# Altium PCB Bee-CC2540.PcbDoc
Units mil, origin at the board's own origin, x right, y up, seen from the top; angles counter-clockwise.
Board outline 6000 x 4000 mil, 2 copper layers (Top Layer, Bottom Layer); 47 components, 37 nets, 165 pads, 2 vias.
Unrouted connection lines stored in the file: 121.
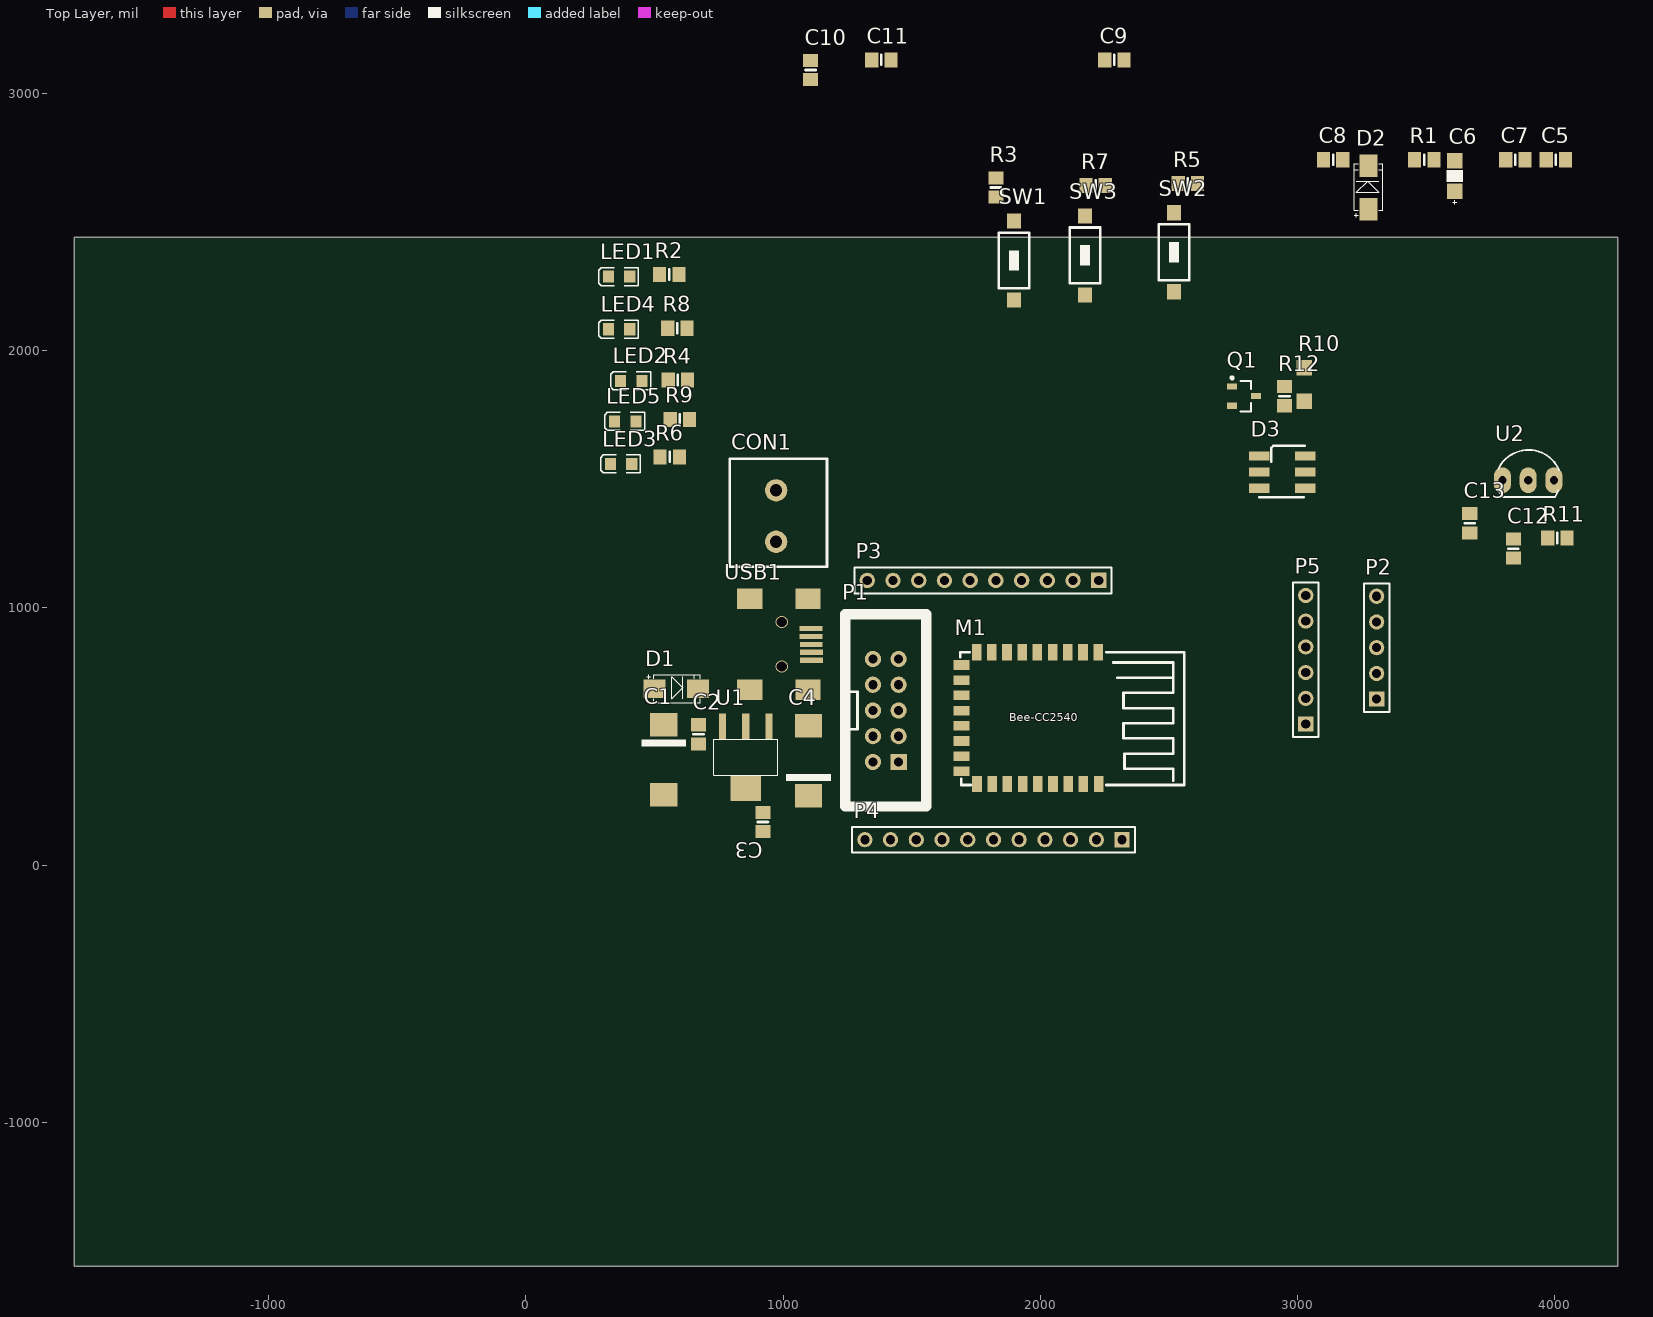
[diagram p0: Top Layer view]
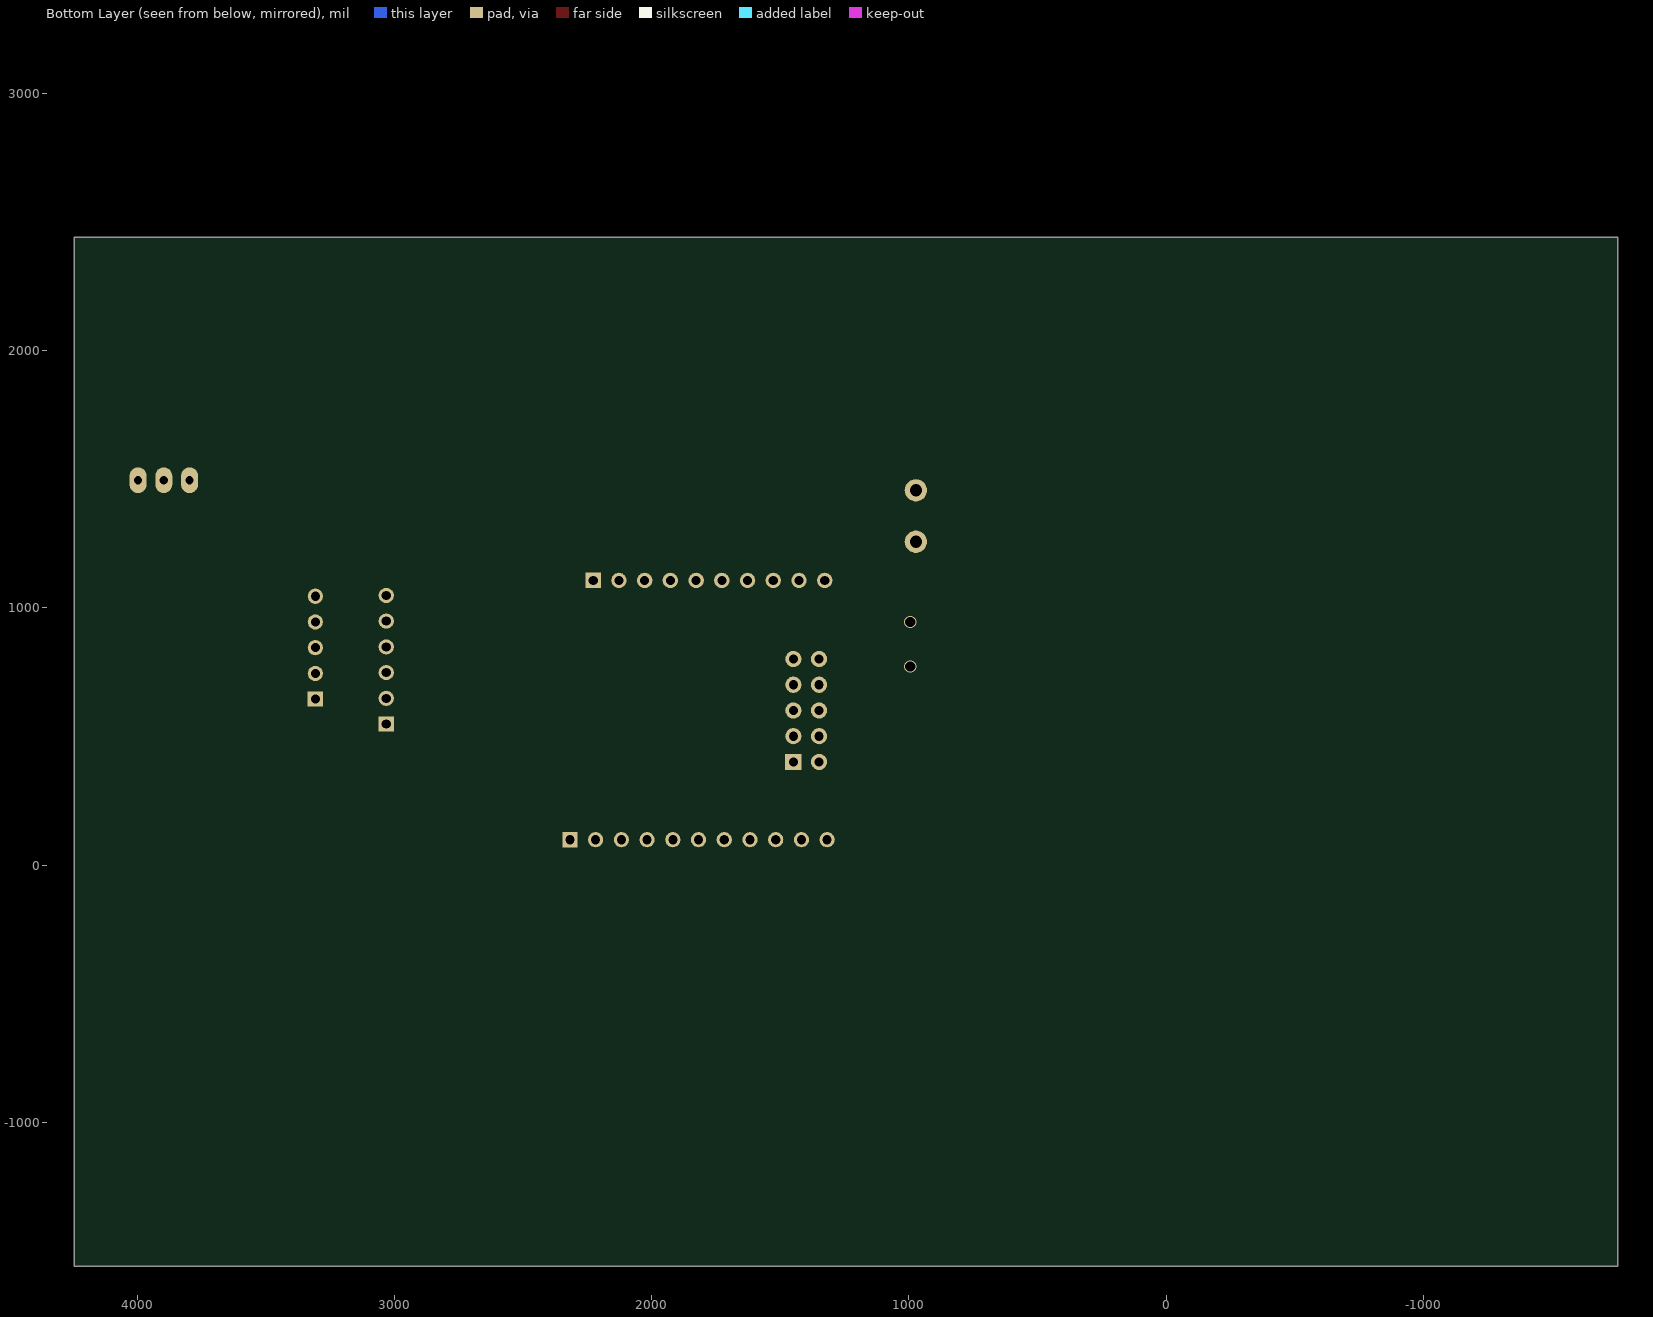
[diagram p1: Bottom Layer view, seen from below]

## Layer stack, top to bottom
Top Solder: solder mask 0.4, Solder Resist, Dk 3.5
Top Layer: signal copper 1.4
Dielectric 1: dielectric 12.6, FR-4, Dk 4.8
Bottom Layer: signal copper 1.4
Bottom Solder: solder mask 0.4, Solder Resist, Dk 3.5

## Board outline
-1755.91,-1559.06 4244.09,-1559.06 4244.09,2440.94 -1755.91,2440.94

## Design rules (kind name [scope] priority, off if disabled: settings)
Clearance [All] p1: gap=10
PolygonConnect [All] p1: connectstyle=Relief reliefconductorwidth=10 reliefentries=4 polygonreliefangle="90 Angle" airgapwidth=10
RoomDefinition Bee-CC2540 [InComponentClass('Bee-CC2540')] p1: confinementstyle=ConfineIn formatcopy=TRUE lockcomponents=FALSE outline 4291.34,-1456.69 15472.45,-1456.69 15472.45,-196.85 4291.34,-196.85
RoutingVias [All] p1: holewidth=28 width=50 viastyle="Through Hole" minholewidth=28 minwidth=50 maxholewidth=28 maxwidth=50
SolderMaskExpansion [All] p1: expansion=4
Width [All] p1: maxlimit=10 minlimit=10 preferedwidth=10
30 further rules are at their usual default settings.

## Components (designator, comment, footprint, x,y, rotation, side; value= is the part's Value field where it differs from the comment)
C1 "Cap Pol3" "CAP TANTALUM 7343" 535.43,409.45 r270 top
C2 "100nF-16V-20%" C0805 671.03,507.87 r90 top
C3 "100nF-16V-20%" C0805 921.26,167.19 r270 top
C4 "220u, 16v" "CAP TANTALUM 7343" 1098.43,405.51 r90 top
C5 "100nF" C0805 4003.95,2741.83 r0 top
C6 "10uF/50V" C1206 3610.24,2623.72 r90 top
C7 "100nF" C0805 3846.46,2741.83 r0 top
C8 "1nF" C0805 3137.8,2741.83 r0 top
C9 "100nF" C0805 2287.41,3129.92 r0 top
C10 "100nF" C0805 1106.3,3090.55 r90 top
C11 "100nF" C0805 1381.9,3129.92 r0 top
C12 "100nF" C0805 3838.58,1230.31 r90 top
C13 "100nF" C0805 3669.29,1328.74 r90 top
CON1 "Terminal 2" "Terminal 2 5.08" 972.44,1356.69 r90 top
D1 "SS14" "DO-214AC (SMA)" 535.43,704.72 r0 top
D2 "SS14" "DO-214AC (SMA)" 3255.91,2584.35 r90 top
D3 "LED" LED5050 2939.96,1527.56 r0 top
LED1 "150080RS75000" LED_0805_Red 362.2,2287.4 r180 top
LED2 "150080RS75000" LED_0805_Red 409.45,1881.89 r180 top
LED3 "150080RS75000" LED_0805_Red 370.08,1559.06 r180 top
LED4 "150080RS75000" LED_0805_Red 362.2,2082.68 r180 top
LED5 "150080RS75000" LED_0805_Red 385.83,1724.41 r180 top
M1 "Bee-CC2540" Bee-CC2540 2224.41,826.77 r270 top
P1 "CABLE 10" "CABLE 10" 1448.82,400.79 r90 top
P2 "Header 5" HDR1X5 3307.09,644.88 r90 top
P3 "Header 10" HDR1X10 2226.77,1106.3 r180 top
P4 "Header 11" HDR1X11 2317.32,98.43 r180 top
P5 "Header 6" HDR1X6 3031.5,548.03 r90 top
Q1 "C1815" 2SC1815 2791.34,1822.84 r0 top
R1 "10k" R0805 3492.13,2741.83 r0 top
R2 "1k" R0805 557.09,2295.28 r180 top
R3 "10k" R0805 1826.77,2633.86 r270 top
R4 "1k" R0805 590.55,1885.83 r180 top
R5 "10k" R0805 2572.84,2649.61 r0 top
R6 "1k" R0805 559.06,1586.61 r180 top
R7 "10k" R0805 2214.57,2641.73 r0 top
R8 "1k" R0805 588.58,2086.61 r180 top
R9 "1k" R0805 598.43,1732.28 r180 top
R10 "220" R1206 3026.36,1803.15 r90 top
R11 "100" R0805 4009.84,1271.65 r0 top
R12 "2k2" R0805 2948.82,1822.84 r90 top
SW1 "SW2" SMD(2) 1897.64,2350.39 r90 top
SW2 "SW2" SMD(2) 2519.69,2381.89 r90 top
SW3 "SW2" SMD(2) 2173.23,2370.08 r90 top
U1 "LM1117-3.3V" LM1117-SOP 854.33,488.19 r180 top
U2 "LM35" QTO-92 3896.06,1496.06 r0 top
USB1 "USB_M" USB_B_MINI_SMD 1108.08,920.1 r90 top

## Footprints (in the part's own frame and the unit in brackets; to place one, negate y for a bottom-side part, rotate by r counter-clockwise, add the part's x,y. Pads: shape width x height; smd on the part's side, far side on the other; paste and mask are expansions set on the pad)
2SC1815 [mm] "2SC1815 SMD"
  rect 1x0.6 smd: 1(-1.175,0.95) 2(-1.175,-0.95) 3(1.175,0)
  silkscreen extent -1.3,-1.5 0.67,1.92, body extent -1.34,-1.5 1.3,1.5, height 1.08
Bee-CC2540 [mm] "Bluetooth 4.0 Bee-CC2540"
  rect 1.6x0.95 smd: 1(0,0) 2(0,-1.5) 3(0,-3) 4(0,-4.5) 5(0,-6) 6(0,-7.5) 7(0,-9) 8(0,-10.5) 9(0,-12) 18(13,-11.96) 19(13,-10.46) 20(13,-8.96) 21(13,-7.46) 22(13,-5.96) 23(13,-4.46) 24(13,-2.96) 25(13,-1.46) 26(13,0.04)
  rect 0.95x1.6 smd: 10(1.25,-13.5) 11(2.75,-13.5) 12(4.25,-13.5) 13(5.75,-13.5) 14(7.25,-13.5) 15(8.75,-13.5) 16(10.25,-13.5) 17(11.75,-13.5)
  silkscreen extent 0,-13.6 13.1,8.5
C0805 [mm] "Chip Capacitor; Body 2.0 x 1.2 mm (LxW typ)"
  rect 1.3x1.5 smd: 1(0.95,0) 2(-0.95,0)
  silkscreen extent 0,-0.5 0,0.5, body extent -1.02,-0.64 0.98,0.62, height 0.78
C1206 [mil]
  rect 60x60 smd: 1(-3.93,0) 2(114.18,0)
  silkscreen extent -55,-31 79,31, body extent -8,-31 118,31, height 63
"CABLE 10" [mm] "Connector; Header; 5x2 Position"
  rect 1.6x1.6 hole 0.9: 1(0,0)
  round 1.6 hole 0.9: 2(0,2.54) 3(2.54,0) 4(2.54,2.54) 5(5.08,0) 6(5.08,2.54) 7(7.62,0) 8(7.62,2.54) 9(10.16,0) 10(10.16,2.54)
  silkscreen extent -4.42,-2.73 14.58,5.27, body extent -5.08,-3.3 15.24,5.84, height 9.86
"CAP TANTALUM 7343" [mm]
  rect 2.3x2.7 smd: 1(-3.45,0) 2(3.45,0)
  silkscreen extent -2,-2.2 -1.3,2.2, body extent -3.7,-2.22 3.7,2.22, height 3.01
"DO-214AC (SMA)" [mm]
  rect 2.2x1.8 smd: 1(-0.899,-0.5) 2(3.397,-0.5)
  silkscreen extent -1.7,-1.9 3.6,0.9, body extent -1.3,-1.8 3.9,0.8, height 2.3
HDR1X5 [mm] "Connector; Header; 5 Position"
  rect 1.5x1.5 hole 0.9: 1(0,0)
  round 1.5 hole 0.9: 2(2.54,0) 3(5.08,0) 4(7.62,0) 5(10.16,0)
  silkscreen extent -1.27,-1.27 11.43,1.27
HDR1X6 [mm] "Connector; Header; 6 Position"
  rect 1.5x1.5 hole 0.9: 1(0,0)
  round 1.5 hole 0.9: 2(2.54,0) 3(5.08,0) 4(7.62,0) 5(10.16,0) 6(12.7,0)
  silkscreen extent -1.27,-1.27 13.97,1.27
HDR1X10 [mil] "Connector; Header; 10 Position"
  rect 60x60 hole 35.43: 1(0,0)
  round 60 hole 35.43: 2(100,0) 3(200,0) 4(300,0) 5(400,0) 6(500,0) 7(600,0) 8(700,0) 9(800,0) 10(900,0)
  silkscreen extent -50,-50 950,50, body extent -50,-50 950,50, height 336
HDR1X11 [mm] "Connector; Header; 11 Position"
  rect 1.5x1.5 hole 0.9: 1(0,0)
  round 1.5 hole 0.9: 2(2.54,0) 3(5.08,0) 4(7.62,0) 5(10.16,0) 6(12.7,0) 7(15.24,0) 8(17.78,0) 9(20.32,0) 10(22.86,0) 11(25.4,0)
  silkscreen extent -1.27,-1.27 26.67,1.27, body extent -1.27,-1.27 26.67,1.27, height 9.37
LED5050 [mm]
  rect 2x0.9 smd: 1(-2.275,1.6) 2(2.275,1.6) 3(-2.275,0) 4(2.275,0) 5(-2.275,-1.6) 6(2.275,-1.6)
  silkscreen extent -2.27,-2.5 2.23,2.6, body extent -2.65,-2.55 2.65,2.45, height 1.6
LED_0805_Red [mm] "Chip LED, 2-Leads, Body 2.0x1.3mm, IPC Medium Density"
  rect 1.1x1.2 smd: 1(-1.05,0) 2(1.05,0)
  silkscreen extent -1.91,-0.89 2.03,0.89, body extent -1,-0.63 1,0.62, height 0.68
LM1117-SOP [mm]
  rect 0.7x2.54 smd: 1(-2.3,-1.27) 2(0,-1.27) 3(2.3,-1.27)
  rect 3x2.54 smd: 2(0,4.826)
  silkscreen extent -3.18,0 3.17,3.56, body extent -3.25,-1.78 3.25,5.18, height 1.68
QTO-92 [mil] "TO-92"
  oval 66x100 hole 32: 1(-100,0) 2(0,0) 3(100,0)
  silkscreen extent -117,-65 120,118, body extent -109,-66 109,95, height 245
R0805 [mm] "Chip Resistor; Body 2.0 x 1.2 mm (LxW typ)"
  rect 1.3x1.5 smd: 1(0.95,0) 2(-0.95,0)
  silkscreen extent 0,-0.5 0,0.5, body extent -1,-0.65 1,0.6, height 0.78
R1206 [mil]
  rect 60x60 smd: 1(0,0) 2(130,0)
  body extent 4,-31 130,31, height 39
SMD(2) [mm]
  rect 1.5x1.4 smd: 1(-3.9,0) 2(3.9,0)
  silkscreen extent -2.75,-1.5 2.75,1.5, body extent -4,-1.8 4,1.8, height 2.55
"Terminal 2 5.08" [mm] "Terminal block 5.08mm 2 ways"
  round 2.2 hole 1.2: 1(-2.54,0) 2(2.54,0)
  silkscreen extent -5.02,-5.02 5.65,4.57, body extent -5.13,-5.15 5.78,4.65, height 14.2
USB_B_MINI_SMD [mm]
  rect 2x2.5 smd: 0(-6.075,0.305) 0(-6.071,6.045) 0(2.925,0.305) 0(2.929,6.045)
  rect 0.5x2.25 smd: 1(0,0) 2(-0.787,-0.013) 3(-1.575,-0.025) 4(-2.362,-0.038) 5(-3.15,-0.051)
  body extent -6.92,-0.37 3.78,8.83, height 3.95

## Part data
C1: "Polarized Capacitor (Surface Mount)"
C2 C3 C5 C7 C8 C9 C10 C11 C12 C13: library part Cap, "CAP CER 0.1UF 16V Y5V 0603"
C4: library part "Cap Pol3", "Polarized Capacitor (Surface Mount)"
C6: library part "Cap Semi", "Capacitor 100n 16V 0603"
D1 D2: library part "D Schottky", "Schottky Diode"
D3: library part LED5050
LED1 LED2 LED3 LED4 LED5: library part led-0805, "SMD mono-color Chip LED, WL-SMCW, Red"
P1: "Header, 5-Pin, Dual row"
P2: "Header, 5-Pin"
P3: "Header, 10-Pin"
P4: "Header, 11-Pin"
P5: "Header, 6-Pin"
Q1: "NPN SMD Transistor"
R1 R2 R3 R4 R5 R6 R7 R8 R9 R10 R11 R12: library part RM, "Resistor SMD"
U1: library part LM1117, "800mA Low-Dropout Linear Regulator"
U2: "Teminal"

## Via types
v1: diameter 47.24, hole 39.37, Top Layer to Bottom Layer, 2 vias

## Nets (pads, with @x,y where several pads share a name; then routed paths per layer and width w, separated by ;. In a path a pad name is that pad's centre, name@x,y a point inside that pad or via, vN(x,y) a via of type N, cw(c..) or ccw(c..) an arc to the next point about the centre after c; other vN are vias at no path point)
3V3: C3.1 C4.1 C5.1 C6.1 C7.1 C9.1 C10.1 C11.1 C12.1 D2.2 M1.2 M1.10 P1.2 P2.1 P5.1 R3.2 R5.2 R7.2 U1.2 U2.1
5V: C1.1 C2.1 D1.2 R10.2 U1.3
ADC1: C13.1 M1.24 P4.3 R11.2
ADC2: M1.25 P4.2
CSN: M1.9 P1.5 P3.6 R3.1 SW1.2
DEBUG_C: M1.4 P1.3 P3.1 R6.2
DEBUG_D: M1.5 P1.4 P3.2 R4.2
GND: C1.2 C2.2 C3.2 C4.2 C5.2 C6.2 C7.2 C8.2 C9.2 C10.2 C11.2 C12.2 C13.2 CON1.1 LED1.2 LED2.2 LED3.2 LED4.2 LED5.2 M1.1 M1.11 P1.1 P2.5 P5.6 Q1.2 SW1.1 SW2.1 SW3.1 U1.1 U2.3 USB1.5
IIC_BIT: M1.23 P4.4
INPUT2: M1.7 P1.10 P3.4 R5.1 SW2.2
INPUT3: M1.8 P1.8 P3.5 R7.1 SW3.2
NetD2_1: D2.1 P1.9
NetD3_1: D3.1 D3.3 D3.5 R10.1
NetD3_2: D3.2 D3.4 D3.6 Q1.3
NetLED1_1: LED1.1 R2.1
NetLED2_1: LED2.1 R4.1
NetLED3_1: LED3.1 R6.1
NetLED4_1: LED4.1 R8.1
NetLED5_1: LED5.1 R9.1
NetP1_7: P1.7 R1.1
NetQ1_1: Q1.1 R12.1
NetR11_1: R11.1 U2.2
OUT0: M1.6 P3.3 R2.2
OUT3: M1.18 P4.9 R8.2
OUT4: M1.26 P4.1 R9.2
PWM1: M1.19 P4.8 R12.2
PWM2: M1.20 P4.7
PWM3: M1.21 P4.6
PWM4: M1.22 P4.5
PWR: M1.15 P2.4 P3.10 P5.5
RESET: C8.1 M1.3 R1.2
RXD: M1.16 P2.3 P4.11
SCL: M1.12 P3.7 P5.3
SCLK: M1.14 P1.6 P3.9 P5.2
SDA: M1.13 P3.8 P5.4
TXD: M1.17 P2.2 P4.10
VCC: CON1.2 D1.1 USB1.1
pads on no net: USB1.0 USB1.2 USB1.3 USB1.4
copper on no net:
  other v1: 994.5,771.49 994.5,944.72